# EAGLE board fretscanner3 (EAGLE 6.6.0)
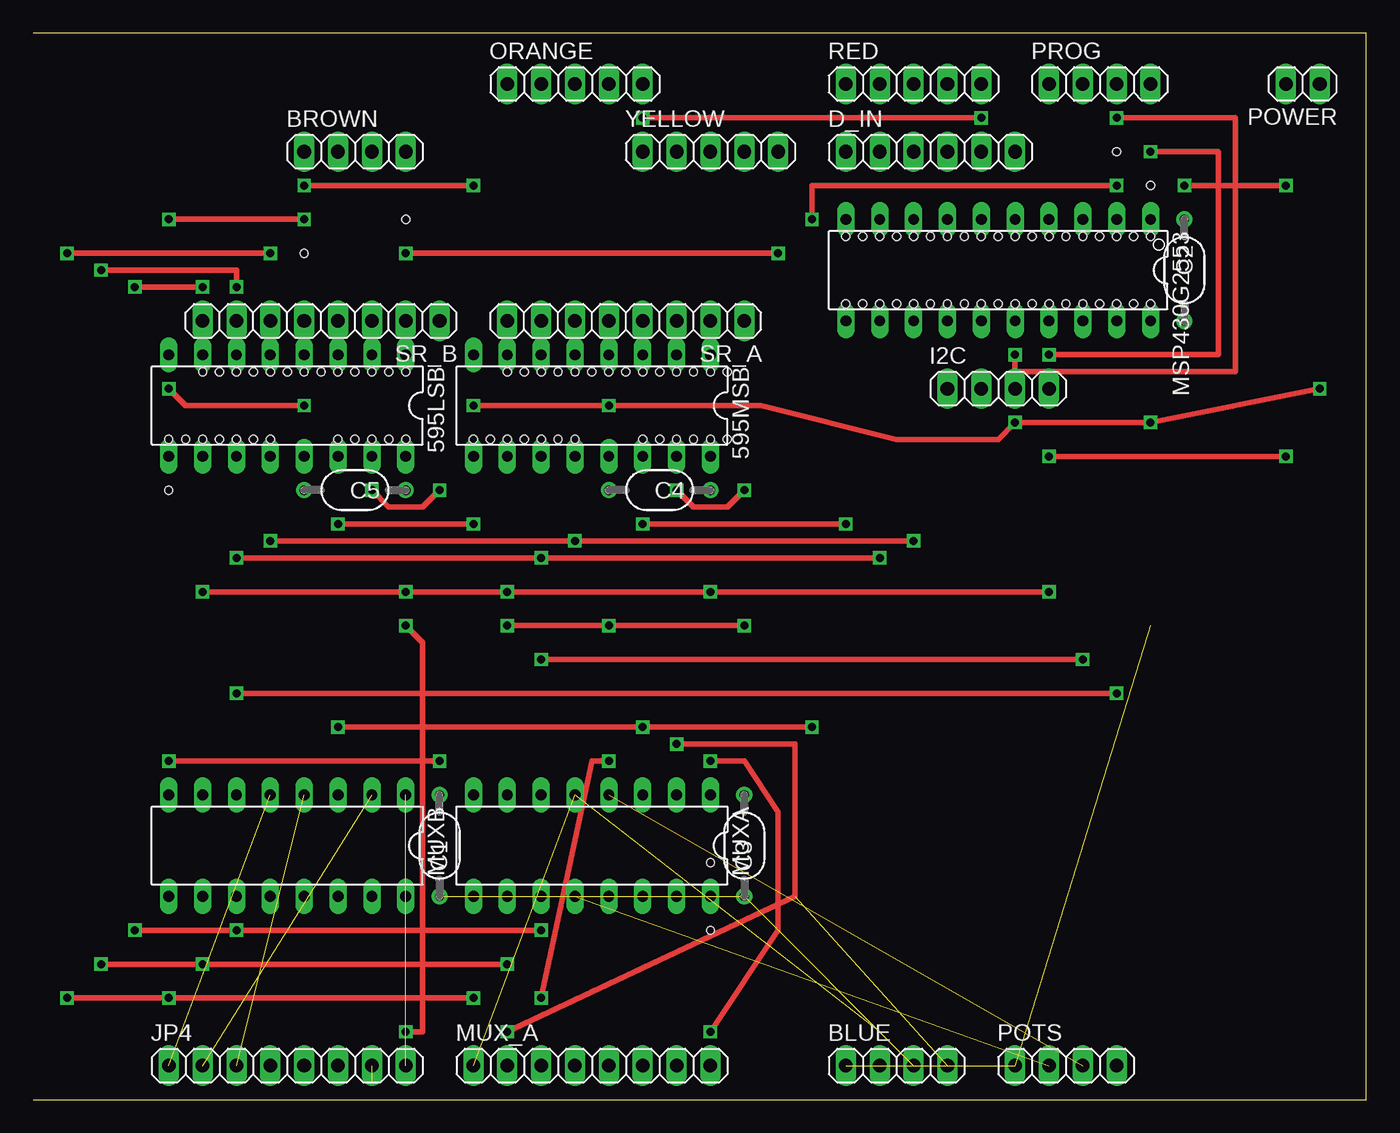
[diagram p0: board, top side]
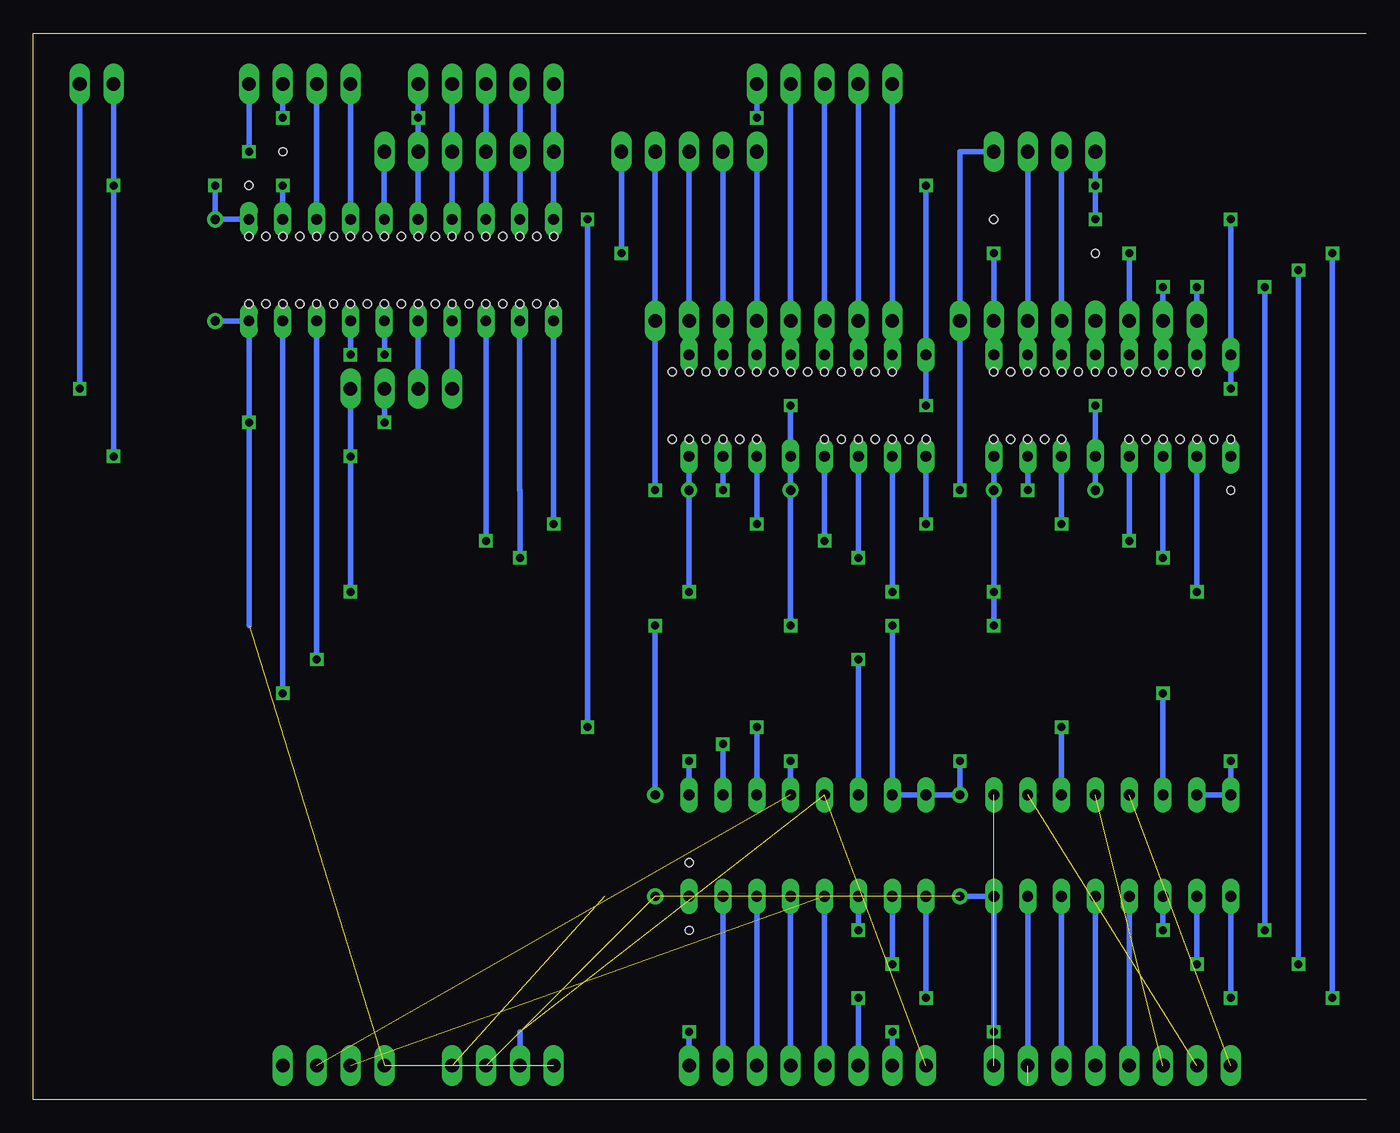
[diagram p1: board, bottom side, seen from below]

Size 100 x 80 mm. Coordinates in mm from the lower left corner, seen from the top.
Outline: 0,0 100,0 100,80 0,80
Copper layers (1*16): Top 0.035mm / dielectric 1.5mm / Bottom 0.035mm
Design rules "default": minimum track width 10mil, minimum drill 24mil, track to track 8mil, track to pad 8mil, pad to pad 8mil, via to via 8mil, smd to smd 8mil, copper to edge 40mil, drill to drill 8mil, minimum pad ring 10mil, minimum via ring 8mil, stop-mask expansion 4mil, vias tented up to drill 0mil, thermal gap 10mil
Holes 0.6 mm at 27.94,66.04 20.32,63.5 81.28,71.12 83.82,68.58 12.7,54.61 15.24,54.61 17.78,54.61 20.32,54.61 22.86,54.61 25.4,54.61 27.94,54.61 35.56,54.61 38.1,54.61 40.64,54.61 43.18,54.61 45.72,54.61 48.26,54.61 50.8,54.61 12.7,49.53 15.24,49.53 17.78,49.53 22.86,49.53 25.4,49.53 27.94,49.53 33.02,49.53 35.56,49.53 38.1,49.53 40.64,49.53 45.72,49.53 48.26,49.53 50.8,49.53 60.96,59.69 63.5,59.69 66.04,59.69 68.58,59.69 71.12,59.69 73.66,59.69 76.2,59.69 78.74,59.69 60.96,64.77 63.5,64.77 66.04,64.77 68.58,64.77 71.12,64.77 73.66,64.77 76.2,64.77 78.74,64.77 81.28,59.69 83.82,59.69 83.82,64.77 81.28,64.77 62.23,64.77 64.77,64.77 67.31,64.77 69.85,64.77 72.39,64.77 74.93,64.77 77.47,64.77 80.01,64.77 62.23,59.69 64.77,59.69 67.31,59.69 69.85,59.69 72.39,59.69 74.93,59.69 77.47,59.69 80.01,59.69 82.55,59.69 82.55,64.77 13.97,54.61 16.51,54.61 19.05,54.61 21.59,54.61 24.13,54.61 26.67,54.61 11.43,49.53 13.97,49.53 16.51,49.53 24.13,49.53 26.67,49.53 36.83,54.61 39.37,54.61 41.91,54.61 44.45,54.61 46.99,54.61 49.53,54.61 52.07,54.61 34.29,49.53 36.83,49.53 39.37,49.53 46.99,49.53 49.53,49.53 52.07,49.53 10.16,45.72 10.16,45.72 10.16,49.53 50.8,12.7 50.8,17.78

## Footprints (pad centres in the part's own frame; a part is rotated, then mirrored left to right if it is on the bottom)
DIL16 = drill 0.813 long: 1 -8.89,-3.81; 2 -6.35,-3.81; 3 -3.81,-3.81; 4 -1.27,-3.81; 5 1.27,-3.81; 6 3.81,-3.81; 7 6.35,-3.81; 8 8.89,-3.81; 9 8.89,3.81; 10 6.35,3.81; 11 3.81,3.81; 12 1.27,3.81; 13 -1.27,3.81; 14 -3.81,3.81; 15 -6.35,3.81; 16 -8.89,3.81
1X04 = drill 1.016 long: 1 -3.81,0; 2 -1.27,0; 3 1.27,0; 4 3.81,0
050X030_050_3 = drill 0.7: 1 -3.81,0; 2 3.81,0
1X06 = drill 1.016 long: 1 -6.35,0; 2 -3.81,0; 3 -1.27,0; 4 1.27,0; 5 3.81,0; 6 6.35,0
1X08 = drill 1.016 long: 1 -8.89,0; 2 -6.35,0; 3 -3.81,0; 4 -1.27,0; 5 1.27,0; 6 3.81,0; 7 6.35,0; 8 8.89,0
N20 = drill 0.813 long: 1 -11.435,-3.81; 2 -8.895,-3.81; 3 -6.355,-3.81; 4 -3.815,-3.81; 5 -1.275,-3.81; 6 1.265,-3.81; 7 3.805,-3.81; 8 6.345,-3.81; 9 8.885,-3.81; 10 11.425,-3.81; 11 11.425,3.81; 12 8.885,3.81; 13 6.345,3.81; 14 3.805,3.81; 15 1.265,3.81; 16 -1.275,3.81; 17 -3.815,3.81; 18 -6.355,3.81; 19 -8.895,3.81; 20 -11.435,3.81
1X05 = drill 1.016 long: 1 -5.08,0; 2 -2.54,0; 3 0,0; 4 2.54,0; 5 5.08,0
1X02 = drill 1.016 long: 1 -1.27,0; 2 1.27,0

## Placement (x,y rotation side)
595LSB  74LS595N  [DIL16]  19.05,52.07 180 top
595MSB  74LS595N  [DIL16]  41.91,52.07 180 top
BLUE  [1X04]  64.77,2.54 0 top
BROWN  [1X04]  24.13,71.12 0 top
C1  100n  [050X030_050_3]  30.48,19.05 90 top
C2  100n  [050X030_050_3]  86.36,62.23 270 top
C3  100n  [050X030_050_3]  53.34,19.05 90 top
C4  100n  [050X030_050_3]  46.99,45.72 180 top
C5  100n  [050X030_050_3]  24.13,45.72 180 top
D_IN  [1X06]  67.31,71.12 0 top
I2C  [1X04]  72.39,53.34 0 top
JP4  [1X08]  19.05,2.54 0 top
MSP430G2553  G2XX3---N20  [N20]  72.39,62.23 180 top
MUX_A  [1X08]  41.91,2.54 0 top
MUXA  4051N  [DIL16]  41.91,19.05 180 top
MUXB  4051N  [DIL16]  19.05,19.05 180 top
ORANGE  [1X05]  40.64,76.2 0 top
POTS  [1X04]  77.47,2.54 0 top
POWER  [1X02]  95.25,76.2 180 top
PROG  [1X04]  80.01,76.2 0 top
RED  [1X05]  66.04,76.2 0 top
SR_A  [1X08]  44.45,58.42 180 top
SR_B  [1X08]  21.59,58.42 180 top
YELLOW  [1X05]  50.8,71.12 0 top

## Library data of the parts
595LSB 595MSB = 74xx-us
BLUE BROWN D_IN I2C JP4 MUX_A ORANGE POTS POWER PROG RED SR_A SR_B YELLOW = pinhead
C1-C5 = gm-caps-ceramic
MSP430G2553 = TI_MSP430_v16
MUXA MUXB = 40xx

## Nets
_RST: MSP430G2553.16 PROG.3
A_IN: MSP430G2553.2 MUXA.3 MUXB.3
D0: D_IN.6 MSP430G2553.5
D1: D_IN.5 MSP430G2553.6 ORANGE.5 RED.5
D2: D_IN.4 MSP430G2553.7 RED.4
D3: D_IN.3 MSP430G2553.8 RED.3
D4: D_IN.2 MSP430G2553.9 RED.2
D5: D_IN.1 MSP430G2553.10 RED.1
GND: 595LSB.8 595LSB.13 595MSB.8 595MSB.13 BLUE.1 BROWN.1 C1.2 C2.2 C3.2 C4.2 C5.2 I2C.3 MSP430G2553.20 MUXA.7 MUXA.8 MUXB.7 MUXB.8 POTS.1 POWER.1
INH_A: MSP430G2553.18 MUXA.6
INH_B: MSP430G2553.19 MUXB.6
JOY_X: BLUE.2 MUX_A.1 MUXA.5
JOY_Y: BLUE.4 MUX_A.2 MUXA.2
N$1: 595LSB.14 595MSB.9
N$2: MUX_A.7 MUXA.15
N$3: MUX_A.6 MUXA.14
N$4: MUX_A.5 MUXA.13
N$6: JP4.3 MUXB.4
N$7: JP4.2 MUXB.2
N$9: JP4.1 MUXB.5
N$10: JP4.8 MUXB.1
N$11: JP4.4 MUXB.12
N$12: JP4.7 MUXB.15
N$13: MUX_A.8 MUXA.1
N$14: JP4.6 MUXB.14
N$17: JP4.5 MUXB.13
ORNG: POTS.4
POT_A: MUX_A.3 MUXA.4 POTS.3
POT_B: MUX_A.4 MUXA.12 POTS.2
RCK: 595LSB.12 595MSB.12 MSP430G2553.13
RXD: MSP430G2553.3 PROG.2
SCK: 595LSB.11 595MSB.11 MSP430G2553.12
SCL: I2C.1 MSP430G2553.14
SDA: I2C.2 MSP430G2553.15
SER: 595MSB.14 MSP430G2553.11
SR0: 595LSB.7 MUXA.11 MUXB.11 SR_B.8
SR1: 595LSB.6 MUXA.10 MUXB.10 SR_B.7
SR2: 595LSB.5 MUXA.9 MUXB.9 SR_B.6
SR3: 595LSB.4 SR_B.5
SR4: 595LSB.3 BROWN.2 SR_B.4
SR5: 595LSB.2 BROWN.3 SR_B.3
SR6: 595LSB.1 SR_B.2 YELLOW.5
SR7: 595LSB.15 BROWN.4 SR_B.1
SR8: 595MSB.7 ORANGE.1 SR_A.8
SR9: 595MSB.6 ORANGE.2 SR_A.7
SR10: 595MSB.5 ORANGE.3 SR_A.6
SR11: 595MSB.4 ORANGE.4 SR_A.5
SR12: 595MSB.3 SR_A.4 YELLOW.1
SR13: 595MSB.2 SR_A.3 YELLOW.2
SR14: 595MSB.1 SR_A.2 YELLOW.3
SR15: 595MSB.15 SR_A.1 YELLOW.4
TEST: MSP430G2553.17 PROG.4
TXD: MSP430G2553.4 PROG.1
VA: 595LSB.10 595LSB.16 595MSB.10 595MSB.16 BLUE.3 C1.1 C2.1 C3.1 C4.1 C5.1 I2C.4 MSP430G2553.1 MUXA.16 MUXB.16 POWER.2

## Tracks (layer width: path | path; a pad name or v marks a point on that pad's centre or on a via)
_RST  (via drill 0.6)
  Top 0.406: v73.66,55.88 73.66,54.61 90.17,54.61 90.17,73.66 v81.28,73.66
  Bottom 0.406: MSP430G2553.16 v73.66,55.88 | v81.28,73.66 PROG.3
A_IN  (via drill 0.6)
  Top 0.406: v81.28,68.58 58.42,68.58 v58.42,66.04 | v58.42,27.94 v45.72,27.94 v22.86,27.94
  Bottom 0.406: MSP430G2553.2 v81.28,68.58 | v58.42,66.04 v58.42,27.94 | MUXA.3 v45.72,27.94 | v22.86,27.94 MUXB.3
D0
  Bottom 0.406: D_IN.6 MSP430G2553.5
D1  (via drill 0.6)
  Top 0.406: v45.72,73.66 v71.12,73.66
  Bottom 0.406: MSP430G2553.6 D_IN.5 v71.12,73.66 RED.5 | ORANGE.5 v45.72,73.66
D2
  Bottom 0.406: MSP430G2553.7 D_IN.4 RED.4
D3
  Bottom 0.406: MSP430G2553.8 D_IN.3 RED.3
D4
  Bottom 0.406: MSP430G2553.9 D_IN.2 63.5,74.93 RED.2
D5
  Bottom 0.406: RED.1 60.96,72.39 D_IN.1 MSP430G2553.10
GND  (via drill 0.6)  (2 unrouted)
  Top 0.406: v10.16,66.04 v20.32,66.04 | v33.02,68.58 v20.32,68.58 | v10.16,53.34 11.43,52.07 v20.32,52.07 | v33.02,52.07 v43.18,52.07 54.61,52.07 64.77,49.53 72.39,49.53 v73.66,50.8 v83.82,50.8 v96.52,53.34 | v35.56,35.56 v43.18,35.56 v53.34,35.56 | v10.16,25.4 v30.48,25.4
  Bottom 0.406: C5.2 595LSB.13 v20.32,52.07 | C2.2 MSP430G2553.20 | v10.16,66.04 595LSB.8 v10.16,53.34 | v33.02,68.58 595MSB.8 v33.02,52.07 | BROWN.1 v20.32,68.58 v20.32,66.04 | MSP430G2553.20 | v73.66,50.8 I2C.3 | v43.18,52.07 595MSB.13 C4.2 v43.18,35.56 | MSP430G2553.20 v83.82,50.8 83.82,35.56 | POWER.1 v96.52,53.34 | v35.56,35.56 MUXA.7 MUXA.8 C1.2 v30.48,25.4 | v53.34,35.56 C3.2 | MUXB.7 MUXB.8 v10.16,25.4
INH_A  (via drill 0.6)
  Top 0.406: v78.74,33.02 v38.1,33.02
  Bottom 0.406: MSP430G2553.18 v78.74,33.02 | v38.1,33.02 MUXA.6
INH_B  (via drill 0.6)
  Top 0.406: v15.24,30.48 v81.28,30.48
  Bottom 0.406: MSP430G2553.19 v81.28,30.48 | MUXB.6 v15.24,30.48
JOY_X  (2 unrouted)
  Bottom 0.406: BLUE.2 63.5,5.08
JOY_Y  (via drill 0.6)  (1 unrouted)
  Top 0.406: v48.26,26.67 57.15,26.67 57.15,15.24 v35.56,5.08
  Bottom 0.406: MUXA.2 v48.26,26.67 | v35.56,5.08 MUX_A.2
N$1  (via drill 0.6)
  Top 0.406: v22.86,43.18 v33.02,43.18
  Bottom 0.406: 595LSB.14 v22.86,43.18 | v33.02,43.18 595MSB.9
N$2
  Bottom 0.406: MUX_A.7 MUXA.15
N$3
  Bottom 0.406: MUX_A.6 MUXA.14
N$4
  Bottom 0.406: MUX_A.5 MUXA.13
N$6  (1 unrouted)
N$7  (1 unrouted)
N$9  (1 unrouted)
N$10  (1 unrouted)
N$11
  Bottom 0.406: MUXB.12 JP4.4
N$12  (1 unrouted)
  Bottom 0.406: MUXB.15 25.4,1.27
N$13  (via drill 0.6)
  Top 0.406: v50.8,25.4 53.34,25.4 55.88,21.59 55.88,12.7 v50.8,5.08
  Bottom 0.406: MUXA.1 v50.8,25.4 | v50.8,5.08 MUX_A.8
N$14
  Bottom 0.406: MUXB.14 JP4.6
N$17
  Bottom 0.406: MUXB.13 JP4.5
POT_A  (via drill 0.6)  (1 unrouted)
  Top 0.406: v43.18,25.4 41.91,25.4 v38.1,7.62
  Bottom 0.406: MUXA.4 v43.18,25.4 | v38.1,7.62 MUX_A.3
POT_B  (1 unrouted)
  Bottom 0.406: MUXA.12 MUX_A.4
RCK  (via drill 0.6)
  Top 0.406: v17.78,41.91 v40.64,41.91 v66.04,41.91
  Bottom 0.406: 595MSB.12 v40.64,41.91 | v17.78,41.91 595LSB.12 | MSP430G2553.13 66.05,45.73 66.04,45.72 v66.04,41.91
RXD
  Bottom 0.406: MSP430G2553.3 PROG.2
SCK  (via drill 0.6)
  Top 0.406: v15.24,40.64 v38.1,40.64 v63.5,40.64
  Bottom 0.406: 595LSB.11 v15.24,40.64 | MSP430G2553.12 63.51,45.73 63.5,45.72 v63.5,40.64 | 595MSB.11 v38.1,40.64
SCL
  Bottom 0.406: MSP430G2553.14 I2C.1
SDA
  Bottom 0.406: MSP430G2553.15 I2C.2
SER  (via drill 0.6)
  Top 0.406: v45.72,43.18 v60.96,43.18
  Bottom 0.406: MSP430G2553.11 60.97,45.73 60.96,45.72 v60.96,43.18 | 595MSB.14 v45.72,43.18
SR0  (via drill 0.6)
  Top 0.406: v12.7,60.96 v7.62,60.96 | v7.62,12.7 v15.24,12.7 v38.1,12.7
  Bottom 0.406: v7.62,60.96 v7.62,12.7 | v15.24,12.7 MUXB.11 | MUXA.11 v38.1,12.7 | 595LSB.7 SR_B.8 v12.7,60.96 595LSB.7
SR1  (via drill 0.6)
  Top 0.406: v15.24,60.96 15.24,62.23 v5.08,62.23 | v5.08,10.16 v12.7,10.16 v35.56,10.16
  Bottom 0.406: SR_B.7 595LSB.6 v15.24,60.96 | MUXB.10 v12.7,10.16 | v5.08,10.16 v5.08,62.23 | MUXA.10 v35.56,10.16
SR2  (via drill 0.6)
  Top 0.406: v17.78,63.5 v2.54,63.5 | v2.54,7.62 v10.16,7.62 v33.02,7.62
  Bottom 0.406: SR_B.6 595LSB.5 v17.78,63.5 | v2.54,63.5 v2.54,7.62 | v10.16,7.62 MUXB.9 | MUXA.9 v33.02,7.62
SR3
  Bottom 0.406: SR_B.5 595LSB.4
SR4
  Bottom 0.406: BROWN.2 SR_B.4 595LSB.3
SR5
  Bottom 0.406: BROWN.3 SR_B.3 595LSB.2
SR6  (via drill 0.6)
  Top 0.406: v27.94,63.5 v55.88,63.5
  Bottom 0.406: 595LSB.1 SR_B.2 v27.94,63.5 | v55.88,63.5 YELLOW.5
SR7  (via drill 0.6)
  Top 0.406: v25.4,45.72 26.67,44.45 29.21,44.45 v30.48,45.72
  Bottom 0.406: BROWN.4 30.48,71.12 SR_B.1 v30.48,45.72 | v25.4,45.72 595LSB.15
SR8
  Bottom 0.406: ORANGE.1 SR_A.8 595MSB.7
SR9
  Bottom 0.406: ORANGE.2 SR_A.7 595MSB.6
SR10
  Bottom 0.406: ORANGE.3 SR_A.6 595MSB.5
SR11
  Bottom 0.406: ORANGE.4 SR_A.5 595MSB.4
SR12
  Bottom 0.406: YELLOW.1 SR_A.4 595MSB.3
SR13
  Bottom 0.406: YELLOW.2 SR_A.3 595MSB.2
SR14
  Bottom 0.406: YELLOW.3 SR_A.2 595MSB.1
SR15  (via drill 0.6)
  Top 0.406: v48.26,45.72 49.53,44.45 52.07,44.45 v53.34,45.72
  Bottom 0.406: YELLOW.4 SR_A.1 v53.34,45.72 | v48.26,45.72 595MSB.15
TEST  (via drill 0.6)
  Top 0.406: v83.82,71.12 88.9,71.12 88.9,55.88 v76.2,55.88
  Bottom 0.406: PROG.4 v83.82,71.12 | v76.2,55.88 76.2,57.15 MSP430G2553.17
TXD
  Bottom 0.406: MSP430G2553.4 PROG.1
VA  (via drill 0.6)  (3 unrouted)
  Top 0.406: v93.98,68.58 v86.36,68.58 | v76.2,48.26 v93.98,48.26 | v76.2,38.1 v50.8,38.1 v35.56,38.1 v27.94,38.1 v12.7,38.1 | v27.94,5.08 29.21,5.08 29.21,34.29 v27.94,35.56
  Bottom 0.406: 595LSB.16 C5.1 v27.94,38.1 v27.94,35.56 | MSP430G2553.1 C2.1 v86.36,68.58 | C4.1 595MSB.16 v50.8,38.1 | POWER.2 v93.98,68.58 v93.98,48.26 | I2C.4 v76.2,48.26 v76.2,38.1 | 595LSB.10 v12.7,38.1 | 595MSB.10 v35.56,38.1 | C1.1 MUXB.16 v27.94,5.08